# Altium PCB Four_Axis_Remoter_V1.0.0.PcbDoc (part 1 of 2)
Units mil, origin at the board's own origin, x right, y up, seen from the top; angles counter-clockwise.
Board outline 7165.07 x 4173.11 mil, 2 copper layers (Top Layer, Bottom Layer); 91 components, 71 nets, 332 pads, 134 vias.
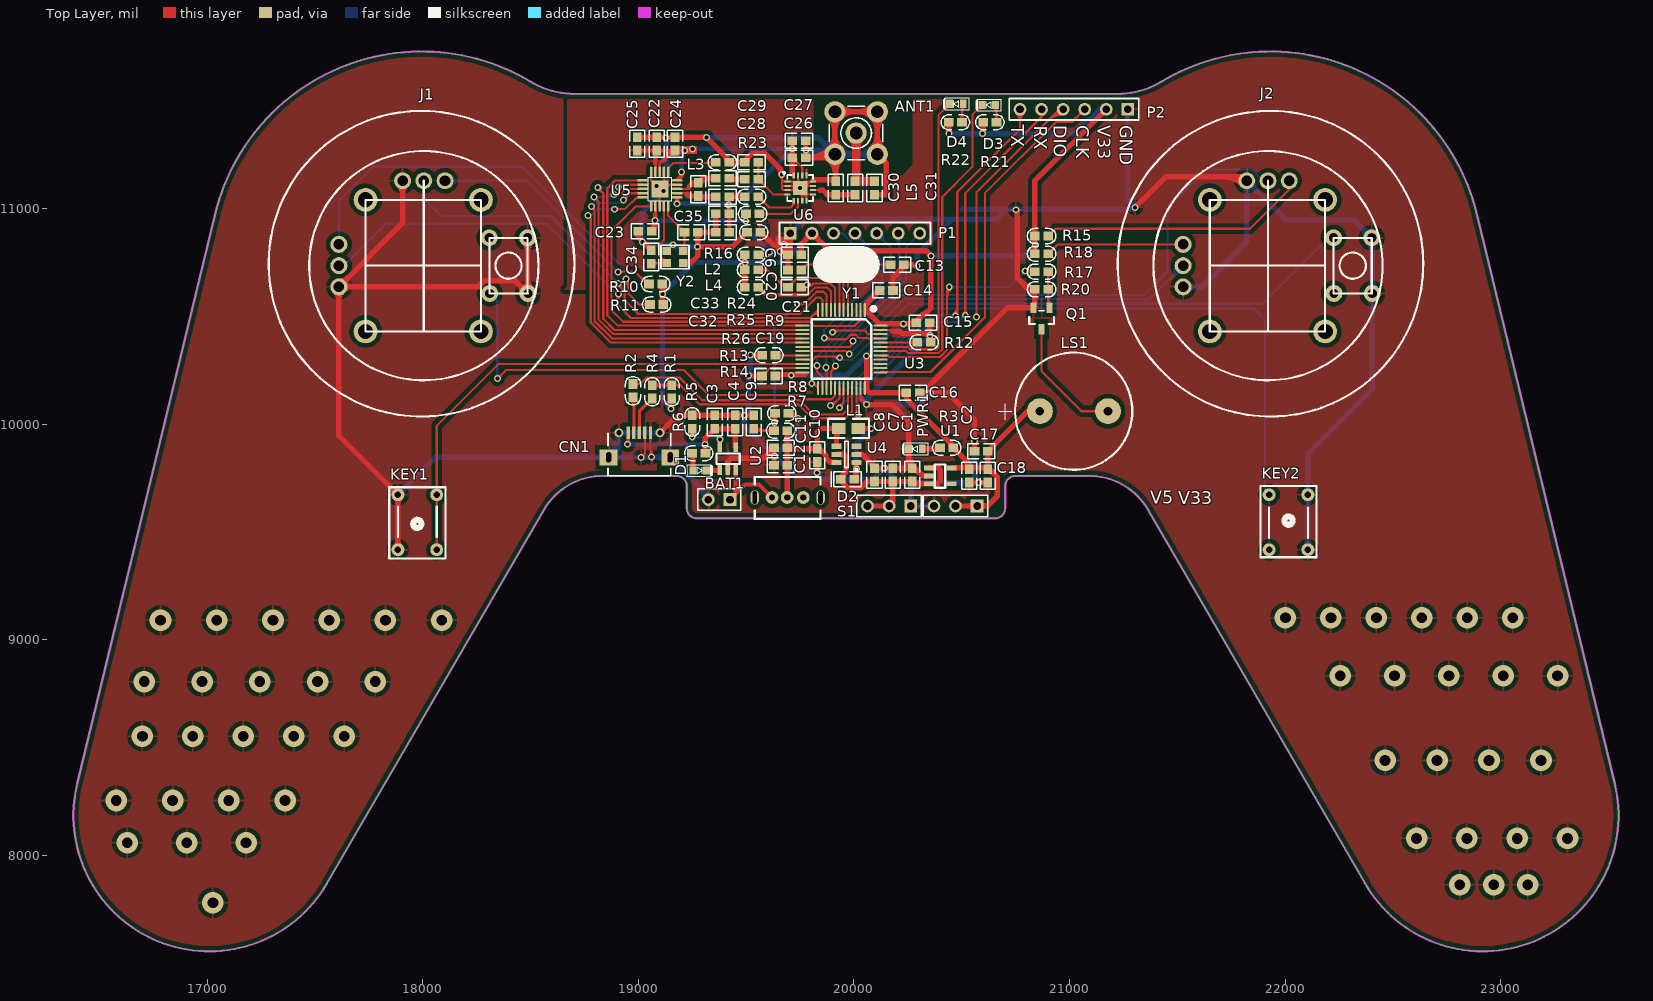
[diagram p0: Top Layer view]
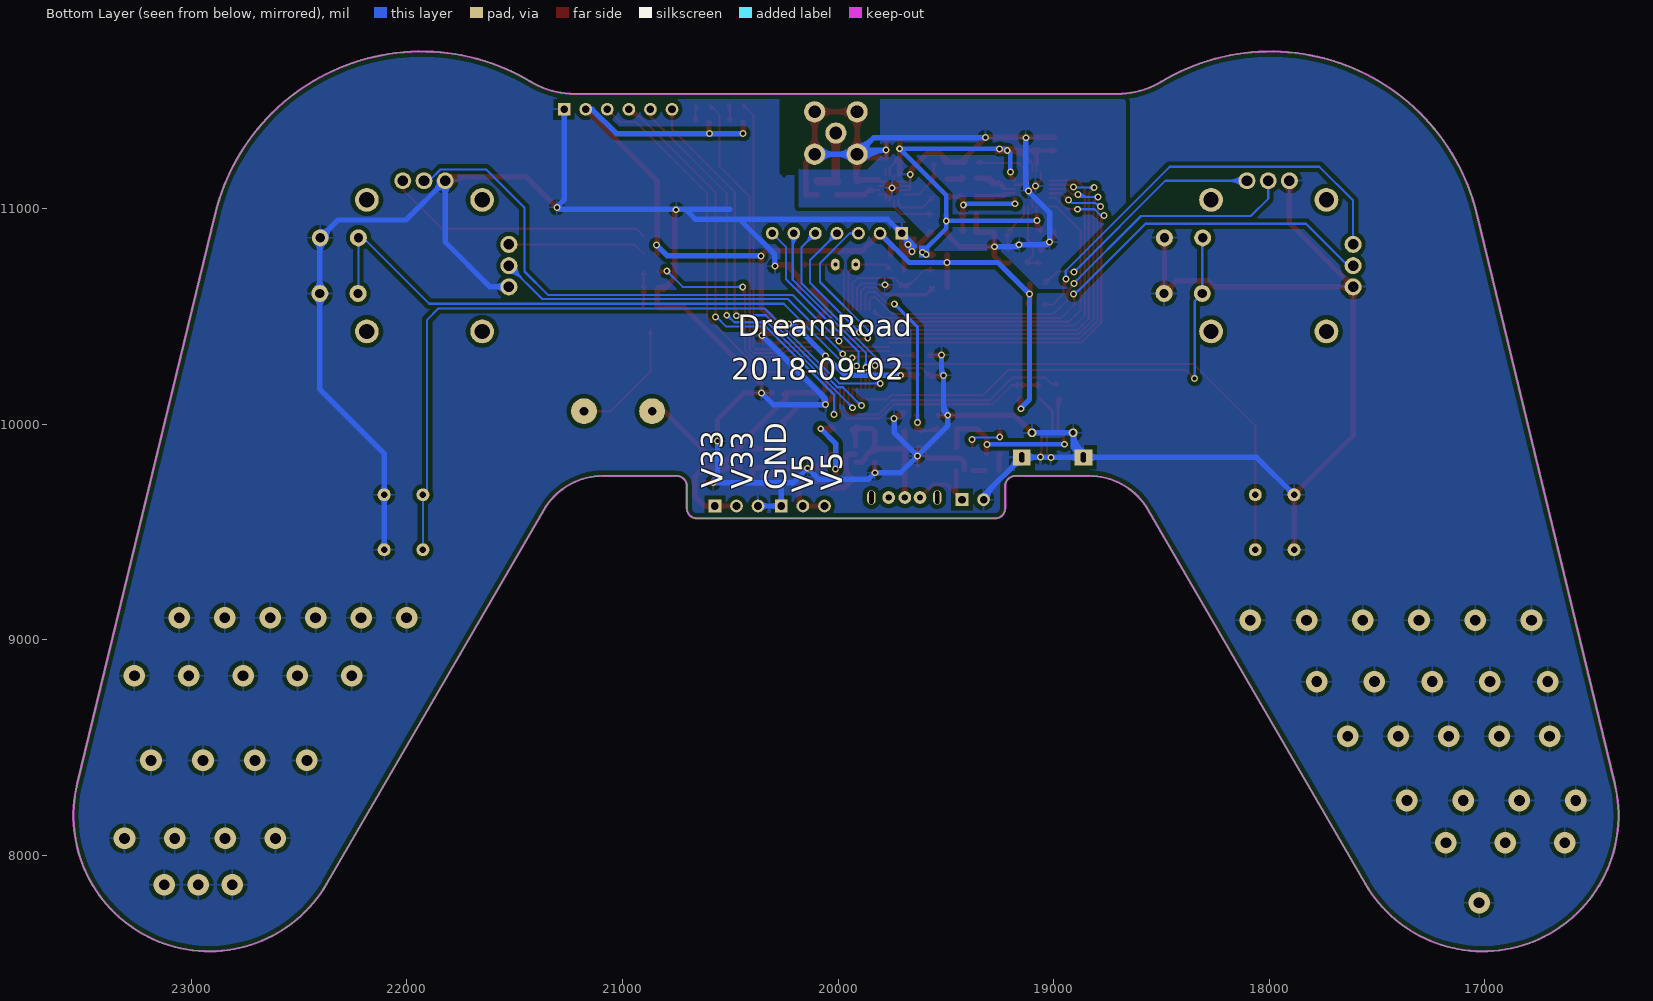
[diagram p1: Bottom Layer view, seen from below]
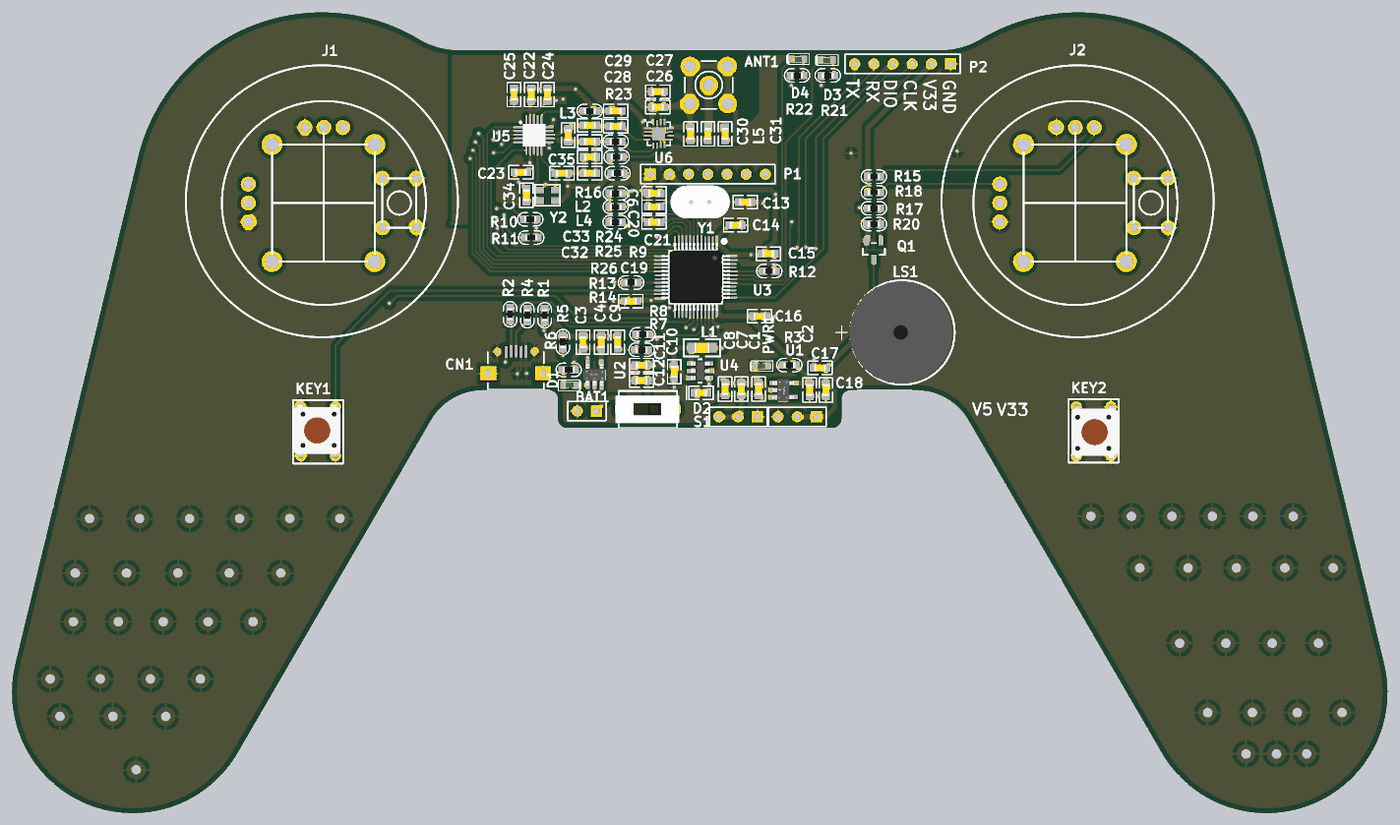
[diagram p3: 3D render of the assembled board from above, using the file's embedded part models]

## Layer stack, top to bottom
Top Layer: signal copper 1.4
Dielectric: dielectric 12.6, FR-4, Dk 4.8
Bottom Layer: signal copper 1.4

## Board outline
16398.01,8333.2 ccw(c17010.24,8184.94) 17554.97,7868.6 18562.17,9602.96 cw(c18834.53,9444.79) 18834.53,9759.75 19177.57,9759.75 cw(c19177.57,9712.5) 19224.81,9712.5 19224.81,9610.14 ccw(c19272.05,9610.14) 19272.05,9562.9 20653.95,9562.9 ccw(c20653.95,9610.14) 20701.19,9610.14 20701.19,9712.5 cw(c20748.43,9712.5) 20748.43,9759.75 21091.47,9759.75 cw(c21091.47,9444.79) 21363.83,9602.96 22371.03,7868.6 ccw(c22915.76,8184.94) 23527.99,8333.2 22888.11,10975.64 ccw(c21931.51,10744) 21424.54,11587.65 cw(c21221.75,11925.1) 21221.75,11531.4 18704.25,11531.4 cw(c18704.25,11925.1) 18501.46,11587.65 ccw(c17994.49,10744) 17037.89,10975.64

## Design rules (kind name [scope] priority, off if disabled: settings)
Clearance Clearance_1 [(InPolygon)] p1: gap=20
Clearance [All] p2: gap=7.87
ComponentClearance [All] p1 off: gap=10 collisioncheckmode=3 verticalgap=10 showdistances=FALSE
HoleSize [All] p1 off: absolutevalues=TRUE maxlimit=100 minlimit=1 maxpercent=80.000 minpercent=20.000
HoleToHoleClearance [All] p1 off: gap=10 allowstackedmicrovias=TRUE
LayerPairs [All] p1 off: enforce=TRUE
MinimumSolderMaskSliver [All] p1 off: minsoldermaskwidth=10
NetAntennae [All] p1 off: netantennaetolerance=0
PolygonConnect [All] p1: connectstyle=Relief reliefconductorwidth=10 reliefentries=4 polygonreliefangle="90 Angle"
RoutingVias [All] p1: holewidth=14 width=24 viastyle="Through Hole" minholewidth=12 minwidth=20 maxholewidth=50 maxwidth=100
SilkToSilkClearance [All] p1 off: silktosilkclearance=10
SilkscreenOverComponentPads [IsPad] p1 off: minsilkscreentomaskgap=10
SolderMaskExpansion [All] p1: expansion=4
Width [All] p1: maxlimit=200 minlimit=10 preferedwidth=10
20 further rules are at their usual default settings.

## Components (designator, comment, footprint, x,y, rotation, side; value= is the part's Value field where it differs from the comment)
ANT1 "SMA-2" SMB_V-RJ45 20010,11350 r270 top locked
BAT1 "BAT" HDR1X2 19425,9650 r180 top
C1 "1uF" C0603 20270,9765 r0 top
C2 "1uF" C0603 20535,9760 r180 top
C3 "4.7uF" C0603 19355,10010 r0 top
C4 "0.1uF" C0603 19450,10010 r0 top
C6 "0.1uF" C0603 19725,10785 r90 top
C7 "22uF" C0603 20180,9765 r0 top
C8 "22uF" C0603 20095,9765 r0 top
C9 "C_0603" C0603 19535,10010 r0 top
C10 "22uF" C0603 19830,9855 r180 top
C11 "C_0603" C0603 19660,9890 r90 top
C12 "4.7uF" C0603 19660,9810 r90 top
C13 "22pF" C0603 20200,10740 r270 top
C14 "4.7uF" C0603 20150,10620 r270 top
C15 "1uF" C0603 20320,10470 r270 top
C16 "0.1uF" C0603 20274,10145 r270 top
C17 "0.1uF" C0603 20590,9875 r90 top
C18 "0.1uF" C0603 20620,9760 r180 top
C19 "0.1uF" C0603 19604,10223 r90 top
C20 "22pF" C0603 19725,10715 r90 top
C21 "0.1uF" C0603 19725,10635 r270 top
C22 "4.7uF" C0603 19085,11300 r180 top
C23 "10nF" C0603 19031,10895 r270 top
C24 "1nF" C0603 19170,11300 r180 top
C25 "33nF" C0603 18995,11300 r180 top
C26 "1.5pF" C0603 19745,11235 r270 top
C27 "1.5pF" C0603 19745,11315 r270 top
C28 "1.5pF" C0603 19525,11135 r270 top
C29 "1pF" C0603 19525,11215 r270 top
C30 "2.2nF" C0603 19915,11095 r180 top
C31 "2.2nF" C0603 20095,11095 r0 top
C32 "2.2nF" C0603 19390,10890 r270 top
C33 "4.7pF" C0603 19390,10975 r270 top
C34 "10pF" C0603 19060,10775 r0 top
C35 "10pF" C0603 19245,10890 r270 top
CN1 "Micro USB" MICRO_USB_9 19005,9960 r0 top
D1 "LED1" LED0603-green 19285,9785 r0 top
D2 "1SS400SMT2R" L0603 19970,9745 r270 top
D3 "LED1" LED0603-green 20625,11480 r180 top
D4 "LED1" LED0603-green 20475,11485 r180 top
J1 "油门摇杆" 摇杆2 18175,10670 r180 top locked
J2 "方向摇杆" 摇杆2 22090,10670 r180 top locked
KEY1 "KEY_L" SW-4PIN-DIP 17975,9545 r180 top
KEY2 "KEY_R" SW-4PIN-DIP 22015,9545 r0 top
L1 "2.2uH" C0805 19975,9980 r180 top
L2 "3.9nH" C0603 19390,11140 r90 top
L3 "8.2nH" C0603 19278,11089 r180 top
L4 "2.7nF" C0603 19390,11055 r90 top
L5 "3.9nH" C0603 20005,11095 r180 top
LS1 "Bell" BUZZER 21020,10060 r180 top
P1 "OLED" HDR1X7 19705,10885 r0 top
P2 "Header 6" HDR1X6 21270,11460 r180 top
PWR1 "RED" LED0603-green 20285,9885 r180 top
Q1 "2K3018" LC-SOT-23(SOT-23-3) 20870,10490 r90 top
R1 "1.5K" "R0603 - 1" 19155,10150 r0 top
R2 "22R" "R0603 - 1" 18975,10155 r180 top
R3 "1K" "R0603 - 1" 20430,9890 r90 top
R4 "22R" "R0603 - 1" 19065,10150 r180 top
R5 "4.7k" "R0603 - 1" 19250,10010 r0 top
R6 "4.7K" "R0603 - 1" 19280,9865 r90 top
R7 "100K" "R0603 - 1" 19660,9970 r270 top
R8 "100K" "R0603 - 1" 19665,10050 r90 top
R9 "10K" "R0603 - 1" 19605,10320 r90 top
R10 "0R" "R0603 - 1" 19080,10650 r90 top
R11 "0R" "R0603 - 1" 19085,10555 r270 top
R12 "10K" "R0603 - 1" 20325,10380 r90 top
R13 "10K" "R0603 - 1" 19525,10715.35 r270 top
R14 "10R" "R0603 - 1" 19525,10635.35 r90 top
R15 "0R" "R0603 - 1" 20870,10872.5 r270 top
R16 "22K" "R0603 - 1" 19390,11215 r270 top
R17 "1K" "R0603 - 1" 20870,10707.5 r90 top
R18 "0R" "R0603 - 1" 20870,10790 r90 top
R20 "10K" "R0603 - 1" 20870,10625 r270 top
R21 "1K" "R0603 - 1" 20630,11400 r270 top
R22 "1K" "R0603 - 1" 20470,11400 r270 top
R23 "1K" "R0603 - 1" 19525,11055 r90 top
R24 "1K" "R0603 - 1" 19530,10975 r90 top
R25 "0R" "R0603 - 1" 19535,10890 r90 top
R26 "0R" "R0603 - 1" 19525,10785.35 r270 top
S1 "SW-SPDT" SWITCH_PWR 19540,9660 r90 top
U1 "TC1185" SOT-23-5 20400,9760 r0 top
U2 "WS4518" SOT-23-5 19415,9840 r90 top
U3 "STM32F103C8T6" LQFP48S 20050,10530 r270 top locked
U4 "WD3120E-6/TR" SOT23-6 19965,9860 r180 top
U5 "Si24R1" QFN-20_4x4 19020,11130 r0 top
U6 "RFX2401C" QFN16 19750,11095 r0 top
V5 "Header 3" HDR1X3 20263,9620.42 r180 top
V33 "Header 3" HDR1X3 20571,9620.42 r180 top
Y1 "XTAL" "XTAL - 2" 19965,10740 r180 top
Y2 "16M" CRYSTAL_RSX-10 19170,10775 r0 top

## Footprints (in the part's own frame and the unit in brackets; to place one, negate y for a bottom-side part, rotate by r counter-clockwise, add the part's x,y. Pads: shape width x height; smd on the part's side, far side on the other; paste and mask are expansions set on the pad)
BUZZER [mil]
  round 120 hole 40: 1(158,0) 2(-158,0)
  silkscreen extent -271,-272 348,272, body extent -260,-270 280,269, height 299
C0603 [mil] "SMT电容"
  rect 40x45 smd: 1(0,31) 2(0,-31)
  silkscreen extent -35,-63 35,63, body extent -18,-32 18,31, height 31
C0805 [mm] "SMT电容"
  rect 1.6x1.3 smd: 1(-1.143,0) 2(1.143,0)
  silkscreen extent -2.41,-1.14 2.41,1.14, body extent -1,-0.67 1,0.68, height 1.2
CRYSTAL_RSX-10 [mm]
  rect 1.03x0.9 smd: 1(-0.965,-0.705) 2(0.965,-0.705) 3(0.965,0.705) 4(-0.965,0.705)
  silkscreen extent -1.65,-1.4 1.65,1.4, body extent -1.6,-1.27 1.61,1.24, height 0.7
HDR1X2 [mm] "Connector; Header; 2 Position"
  rect 1.5x1.5 hole 0.9: 1(0,0)
  round 1.5 hole 0.9: 2(2.54,0)
  silkscreen extent -1.27,-1.27 3.81,1.27
HDR1X3 [mm] "Connector; Header; 3 Position"
  rect 1.5x1.5 hole 0.9: 1(0,0)
  round 1.5 hole 0.9: 2(2.54,0) 3(5.08,0)
  silkscreen extent -1.27,-1.27 6.35,1.27
HDR1X6 [mm] "Connector; Header; 6 Position"
  rect 1.5x1.5 hole 0.9: 1(0,0)
  round 1.5 hole 0.9: 2(2.54,0) 3(5.08,0) 4(7.62,0) 5(10.16,0) 6(12.7,0)
  silkscreen extent -1.27,-1.27 13.97,1.27
HDR1X7 [mm] "Connector; Header; 7 Position"
  rect 1.5x1.5 hole 0.9: 1(0,0)
  round 1.5 hole 0.9: 2(2.54,0) 3(5.08,0) 4(7.62,0) 5(10.16,0) 6(12.7,0) 7(15.24,0)
  silkscreen extent -1.27,-1.27 16.51,1.27
L0603 [mil]
  rect 40x45 smd: 1(0,31) 2(0,-31)
  silkscreen extent -35,-76 35,63, body extent -18,-32 18,31, height 31
LC-SOT-23(SOT-23-3) [mm]
  rect 1.25x0.7 smd: 1(1.25,-0.95) 2(1.25,0.95) 3(-1.25,0)
  silkscreen extent -0.65,-1.46 0.9,1.46
LED0603-green [mm]
  rect 0.8x1 smd: 1(-0.8,0) 2(0.8,0)
  silkscreen extent -1.5,-0.7 1.5,0.7, body extent -0.8,-0.38 0.8,0.42, height 0.6
LQFP48S [mil] "DPIN-0.5"
  oval 65x10 smd: 1(0.42,0.29) 2(0.42,-19.39) 3(0.42,-39.08) 4(0.42,-58.76) 5(0.42,-78.45) 6(0.42,-98.13) 7(0.42,-117.82) 8(0.42,-137.5) 9(0.42,-157.19) 10(0.42,-176.87) 11(0.42,-196.56) 12(0.42,-216.24) 25(362.63,-216.24) 26(362.63,-196.56) 27(362.63,-176.87) 28(362.63,-157.19) 29(362.63,-137.5) 30(362.63,-117.82) 31(362.63,-98.13) 32(362.63,-78.45) 33(362.63,-58.76) 34(362.63,-39.08) 35(362.63,-19.39) 36(362.63,0.29)
  oval 10x65 smd: 13(73.26,-289.08) 14(92.94,-289.08) 15(112.63,-289.08) 16(132.31,-289.08) 17(152,-289.08) 18(171.68,-289.08) 19(191.37,-289.08) 20(211.05,-289.08) 21(230.74,-289.08) 22(250.42,-289.08) 23(270.11,-289.08) 24(289.79,-289.08) 37(289.79,73.13) 38(270.11,73.13) 39(250.42,73.13) 40(230.74,73.13) 41(211.05,73.13) 42(191.37,73.13) 43(171.68,73.13) 44(152,73.13) 45(132.31,73.13) 46(112.63,73.13) 47(92.94,73.13) 48(73.26,73.13)
  silkscreen extent -10,-246 319,46, body extent 3,-284 357,70, height 59
MICRO_USB_9 [mm]
  rect 0.4x1.5 smd: 1(-1.3,0) 2(-0.65,0) 3(0,0) 4(0.65,0) 5(1.3,0)
  round 1.05 hole 0.6: 6(-2.425,0) 7(2.425,0)
  rect 2.1x1.9 hole 0.6 slot 1.2 at 90 deg: 8(-3.625,-2.9) 9(3.625,-2.9)
  silkscreen extent -3.7,-5.05 3.7,-0.05
QFN16 [mm] "QFN, 16-Leads, Body 3.1x3.1mm (max), Pitch 0.50mm, IPC Medium Density"
  rect 0.7x0.25 smd: 1(-1.5,0.75) 2(-1.5,0.25) 3(-1.5,-0.25) 4(-1.5,-0.75) 9(1.5,-0.75) 10(1.5,-0.25) 11(1.5,0.25) 12(1.5,0.75)
  rect 0.25x0.7 smd: 5(-0.75,-1.5) 6(-0.25,-1.5) 7(0.25,-1.5) 8(0.75,-1.5) 13(0.75,1.5) 14(0.25,1.5) 15(-0.25,1.5) 16(-0.75,1.5)
  rect 0x0 smd: 17(-1.25,0) 19(0,1.25) 21(1.25,0) 23(0,-1.25)
  rect 1.7x1.7 smd: 17(0,0)
  silkscreen extent -1.98,-1.52 1.52,1.88
QFN-20_4x4 [mm] "QFN, 20-Leads, Body 4.0x4.0mm (max), Pitch 0.50mm, IPC Medium Density"
  rect 2x2 smd: 0(2.032,-1.016)
  oval 1.25x0.3 smd: 1(0,0) 2(0,-0.5) 3(0,-1) 4(0,-1.5) 5(0,-2) 11(4.064,-2) 12(4.064,-1.5) 13(4.064,-1) 14(4.064,-0.5) 15(4.064,0)
  round 0.5 on Top Overlay: 3(0.254,0.635)
  oval 0.3x1.25 smd: 6(1,-3.048) 7(1.5,-3.048) 8(2,-3.048) 9(2.5,-3.048) 10(3,-3.048) 16(3,1.016) 17(2.5,1.016) 18(2,1.016) 19(1.5,1.016) 20(1,1)
  silkscreen extent 0.64,-2.41 3.43,0.38, body extent 0.53,-2.54 3.53,0.46, height 0.62
"R0603 - 1" [mil] "SMT电阻"
  rect 40x45 smd: 1(0,31) 2(0,-31)
  silkscreen extent -35,-66 35,66, body extent -15,-31 16,31, height 20
SMB_V-RJ45 [mm] "Connector; SMB Straight"
  round 2.5 hole 1.5: 1(0,0) 2(-2.5,2.5) 2(-2.5,-2.5) 2(2.5,2.5) 2(2.5,-2.5)
  silkscreen extent -3.15,-3.15 3.15,3.15
SOT23-6 [mm]
  rect 1.15x0.6 smd: 1(-1.175,0.95) 2(-1.175,0) 3(-1.175,-0.95) 4(1.175,-0.95) 5(1.175,0) 6(1.175,0.95)
  silkscreen extent -1.3,-1.55 0.2,1.92, body extent -1.25,-1.4 1.18,1.4, height 1.09
SOT-23-5 [mil]
  rect 45x22 smd: 1(-52.5,37) 2(-52.5,0) 3(-52.5,-37) 4(52.5,-37) 5(52.5,37)
  silkscreen extent -26,-55 24,53, body extent -57,-57 54,57, height 43
SW-4PIN-DIP [mil]
  round 60 hole 30: 1(-90,127.5) 1(-90,-127.5) 2(90,127.5) 2(90,-127.5)
  silkscreen extent -130,-163 130,168, body extent -117,-160 127,151, height 191
SWITCH_PWR [mm]
  round 1.5 hole 0.75: 1(0,-2.032) 2(0,-3.81) 3(0,-5.715)
  oval 1.676x1 hole 0.5 slot 1.5 at 0 deg: ""(0,0) ""(0,-7.747)
  silkscreen extent -2.54,-7.75 2.41,0, body extent -1.85,-8.06 1.85,0.44, height 6.5
"XTAL - 2" [mm] "10*4.5----5"
  oval 1x1.4 hole 0.5: 1(-1.2,0) 2(1.2,0)
  silkscreen extent -3.81,-2.05 3.81,2.05, body extent -3.81,-2.06 3.81,2.06, height 1.8
摇杆2 [mm]
  round 2.8 hole 1.8: 0(-2.413,6.102) 0(-2.413,-9.398) 0(11.176,6.102) 0(11.176,-9.398)
  round 2 hole 1.25: 1(14.318,0.849) 2(14.318,-1.651) 3(14.318,-4.151) 4(6.818,-11.651) 5(4.318,-11.651) 6(1.818,-11.651)
  round 2 hole 1.1: J1(-7.95,1.626) J1(-7.904,-4.925) J2(-3.45,1.626) J2(-3.404,-4.925)
  silkscreen extent -9.18,-15.15 17.81,11.85

## Part data
ANT1: library part CHIP_ANTENNA
BAT1: "Header, 2-Pin"
C1 C2 C3 C4 C6 C12: library part 电容
C7 C8 C10 C13 C14 C15 C16 C17 C18 C19 C20 C22 C23 C24 C25 C26 C27 C28 C29 C30 C31 C32 C33 C34 C35: library part CAP, "SMT电容"
C21: library part C
CN1: library part Mini_USB_2, "MINI USBͷ"
D1 D3 D4: library part LED0, "Typical INFRARED GaAs LED"
D2: library part "Diode 1N914", "二极管"
J1 J2: library part 摇杆_1, "摇杆"
KEY1 KEY2: library part KEY
L1 L2 L3 L4 L5: library part Inductor, "Inductor"
LS1: "Electrical Bell"
P1: library part "Header 7", "Header, 7-Pin"
P2: "Header, 6-Pin"
PWR1: library part LED1
Q1: library part NMOS-2, "N-Channel Power MOSFET"
R1 R2 R3 R4 R5 R6 R7 R8 R9 R10 R11 R12 R13 R14 R15 R16 R17 R18 R20 R21 R22 R23 R24 R25 R26: library part RES1, "SMT电阻"
S1: "SPDT Subminiature Toggle Switch, Right Angle Mounting, Vertical Actuation"
U1: library part S1132, "DC-DC"
U2: library part LTC4054
U3: "STM32 ARM-based 32-bit MCU with 64 Kbytes Flash, 48-pin LQFP, Industrial Temperature"
U4: library part S-8261
U5: library part nRF24L01
V5 V33: "Header, 3-Pin"
Y1: "Crystal Oscillator"
Y2: library part XTAL-4, "Crystal Oscillator"

## Via types
v1: diameter 32, hole 18, Top Layer to Bottom Layer, tented both sides, 88 vias
v2: diameter 100, hole 50, Top Layer to Bottom Layer, tented both sides, 46 vias

## Nets (pads, with @x,y where several pads share a name; then routed paths per layer and width w, separated by ;. In a path a pad name is that pad's centre, name@x,y a point inside that pad or via, vN(x,y) a via of type N, cw(c..) or ccw(c..) an arc to the next point about the centre after c; other vN are vias at no path point)
ADC_BAT: C9.2 R7.2 R8.1 U3.10 | length 1383
  Top Layer w10: v1@19740,10556.85 19769.26,10556.85 19826.7,10614.29 19857.58,10614.29 19873.13,10598.74 U3.10@19873.13,10529.58 19873.13,10568.26 ; v1@19746.78,10549.56 cw(c19764.38,10531.96) 19764.38,10556.85 ; v1@19746.78,10565.12 ccw(c19766.73,10585.07) 19766.73,10556.85
  Top Layer w15: C9.2@19535,9979 19544,9970 R7.2@19629,9970 19634,9975 R8.1@19634,10050 ; C9.2@19543.84,9985.34 ccw(c19580.87,10022.37) 19580.87,9970 ; R7.2@19617.66,9961.16 ccw(c19596.32,9939.82) 19596.32,9970 ccw(c19596.32,10000.18) R7.2@19617.66,9978.84 ; R7.2@19622.66,9978.84 ccw(c19595.29,10006.21) v1@19634,10006.21 ; v1@19624.99,10001.91 cw(c19603.24,9980.15) R7.2@19634,9980.15 ; v1@19624.99,10013.93 ccw(c19603.24,10035.68) R8.1@19634,10035.68 ; R8.1@19625.16,10041.16 cw(c19603.82,10019.82) 19634,10019.82 cw(c19664.18,10019.82) R8.1@19642.84,10041.16 ; v1@19634,9994.14 ccw(c19655.64,9994.14) R7.2@19640.34,9978.84
  Bottom Layer w15: v1@19624.99,10013.93 ccw(c19610.48,10028.44) 19631,10028.44 ccw(c19651.52,10028.44) v1@19637.01,10013.93 ; v1(19631,10007.92) 19631,10449.34 v1(19739,10557.34) ; v1@19730.5,10557.34 cw(c19709.98,10557.34) 19724.49,10542.83 cw(c19739,10528.32) v1@19739,10548.84
ADC_PITCH: J1.2 U3.12 | length 2652.7
  Top Layer w10: v1@18900.22,10594.85 cw(c18891.1,10585.72) 18904,10585.72 ; 18904,10566.41 cw(c18944.21,10566.41) v1@18915.78,10594.85 ; v1@18904,10600.69 18904,10553.75 18965.26,10492.49 19796.67,10492.49 U3.12@19833.76,10529.58 ; 19803.88,10499.7 cw(c19833.76,10469.83) U3.12@19833.76,10512.08 ; 19820.95,10516.77 cw(c19833.76,10503.97) U3.12@19833.76,10522.08
  Bottom Layer w10: J1.2@17611.3,10735 17635.07,10735 17829.6,10929.54 18574.43,10929.54 18901.35,10602.62 v1(18908,10602.62) ; 18877.86,10626.11 ccw(c18908,10656.24) v1@18908,10613.62
ADC_ROLL: J1.5 U3.11 | length 2348.1
  Top Layer w10: v1@18902,10648.57 18902.89,10648.57 18936.87,10614.58 18936.87,10574.14 19000.65,10510.36 19748.04,10510.36 19825.15,10587.47 19842.27,10587.47 19853.44,10576.3 U3.11@19853.44,10529.58 ; v1@18906,10641 cw(c18906,10630.24) 18913.61,10637.85 ; v1@18917,10652 ccw(c18959.35,10652) 18929.4,10622.05
  Bottom Layer w10: J1.5@18005,11128.7 18005,11045.77 18085.85,10964.93 18594.85,10964.93 18907,10652.78 18906.22,10652 v1(18906,10652) ; 18885.96,10673.82 cw(c18864.15,10652) v1@18895,10652 ; 18890.26,10669.52 ccw(c18906,10685.26) v1@18906,10663
ADC_THRUST: J2.2 U3.19 | length 2198.3
  Top Layer w10: U3.19@19760.92,10338.63 19963.64,10338.63 v1@19973,10329.27
  Bottom Layer w10: v1(19978,10325.69) 20232.88,10580.57 21371.87,10580.57 J2.2@21526.3,10735 ; v1@19978,10336.69 ccw(c19978,10363.24) 19996.78,10344.47 ccw(c20015.56,10325.69) v1@19989,10325.69 ; J2.2@21491.93,10735 cw(c21408.95,10735) 21467.63,10676.33 cw(c21526.3,10617.65) J2.2@21526.3,10700.63 ; J2.2@21501.93,10735 cw(c21443.09,10735) 21484.7,10693.4 cw(c21526.3,10651.8) J2.2@21526.3,10710.63
ADC_YAW: J2.5 U3.18 | length 2754.6
  Top Layer w10: U3.18@19760.92,10358.32 19980.84,10358.32 v1@20001.51,10378.99 ; 19987.11,10364.58 ccw(c19979.68,10372) v1@19987.65,10378.84
  Bottom Layer w10: v1(19996,10386) 20208.44,10598.44 21344.29,10598.44 21454,10708.15 21454,11003.77 21631.17,11180.94 21843.22,11180.94 21895.46,11128.7 J2.5@21920,11128.7 ; v1@19996,10397 ccw(c19996,10423.56) 20014.78,10404.78 ccw(c20033.56,10386) v1@20007,10386
BEEP: R17.1 U3.41 | length 1342.6
  Top Layer w10: U3.41@20123.13,10318.95 20124.94,10317.13 20158.03,10317.13 20163.79,10311.38 20398.64,10311.38 20432,10344.74 20432,10618.61 v1@20447,10633.61 ; 20432,10585.84 cw(c20492.7,10585.84) v1@20449.78,10628.76 ; 20432,10609.98 cw(c20468.56,10609.98) v1@20442.71,10635.83 ; v1@20788,10703.31 20792.19,10707.5 R17.1@20839,10707.5 R17.1@20834.19,10702.69 ; v1@20801.78,10702.46 cw(c20813.93,10690.31) 20813.93,10707.5 ; v1@20801.78,10718.02 ccw(c20827.18,10743.42) R17.1@20827.18,10707.5 ; R17.1@20825.89,10696.89 ccw(c20800.29,10671.29) 20800.29,10707.5 ccw(c20800.29,10743.71) R17.1@20825.89,10718.11 ; U3.41@20150.63,10318.95 cw(c20150.63,10305.44) 20160.17,10314.99 ccw(c20150.63,10305.44) U3.41@20150.63,10318.95
  Bottom Layer w10: v1(20442,10636.54) 20720.3,10636.54 v1(20794,10710.24) ; v1@20449.78,10628.76 cw(c20468.56,10609.98) 20468.56,10636.54 cw(c20468.56,10663.1) v1@20449.78,10644.32 ; v1@20783,10710.24 cw(c20756.44,10710.24) 20775.22,10691.46 cw(c20794,10672.69) v1@20794,10699.24
DC_V3.3: C2.2 C6.2 C14.2 C15.2 C16.2 C17.2 C18.2 C19.2 LS1.1 P1.2 P2.2 R1.2 R3.2 R10.2 R11.1 R13.2 R14.1 R15.2 R18.1 R21.2 R22.2 R26.2 U1.5 U3.1 U3.24 U3.36 U3.48 V33.1 V33.2 | length 8599.8
  Top Layer w25: 19111,10579.14 ccw(c19137.64,10579.14) R11.1@19118.8,10560.3 ; R10.2@19111,10650 19111,10560 R11.1@19116,10555 ; v1(19152,10071.15) 19152,10116 R1.2@19155,10119 ; 19152,10091.15 cw(c19180.35,10091.15) R1.2@19160.3,10111.2 ; R14.1@19494,10635.35 R13.2@19494,10715.35 R26.2@19494,10785.35 ; C19.2@19631,10230 19635,10230 19774.27,10230 ; C19.2@19642.8,10217.7 cw(c19672.51,10187.99) 19672.51,10230 ; 19692.86,10230 cw(c19692.86,10210.68) v1@19706.53,10224.34 ; v1@19711.47,10224.34 cw(c19725.14,10210.68) 19725.14,10230 ; C6.2@19756,10785 19756,10836 P1.2@19805,10885 19885.59,10804.41 20332.99,10804.41 v1(20357,10780.41) ; P1.2@19787.97,10885 cw(c19746.86,10885) 19775.93,10855.93 cw(c19805,10826.86) 19805,10867.97 cw(c19805,10826.86) 19834.07,10855.93 cw(c19863.14,10885) P1.2@19822.03,10885 ; 20055.98,10551.61 20063,10558.62 ; v1@20057,10309.59 v1@20058,10310.59 ; v1(20058,10316.46) 20059,10315.46 20059,10160.16 20074.16,10145 C16.2@20243,10145 20243,10117.31 20461,9899.31 R3.2@20461,9890 20535,9816 C2.2@20535,9797 ; C14.2@20101.93,10602.93 ccw(c20084.86,10620) C14.2@20109,10620 ; C14.2@20119,10620 20055.98,10556.98 20055.98,10527.23 20117.91,10465.3 v1(20230,10465.3) 20284.3,10465.3 C15.2@20289,10470 20289,10479.31 20320.06,10510.37 ; 20243,10120.86 cw(c20269.64,10120.86) C16.2@20250.8,10139.7 ; 20257.05,10465.3 ccw(c20257.05,10499.45) C15.2@20281.2,10475.3 ; C15.2@20299,10470 cw(c20345.63,10470) 20312.66,10502.97 ; 20329.37,10510.37 20356,10537 v1@20356,10774.71 ; 20437.34,9922.97 cw(c20404.37,9890) R3.2@20451,9890 ; v1@20439,11345.59 R22.2@20439,11400 ; U1.5@20452.5,9797 C2.2@20535,9797 ; V33.2@20471,9620.42 V33.1@20571,9620.42 20619.49,9620.42 20665,9665.93 20665,9755.31 20629.31,9791 C18.2@20620,9791 ; R3.2@20471,9890 ccw(c20495.14,9890) R3.2@20478.07,9872.93 ; 20506.29,9844.71 cw(c20455.07,9793.5) C2.2@20527.5,9793.5 ; 20508.44,9797 cw(c20508.44,9766.94) C2.2@20529.7,9788.2 ; C2.2@20535,9791 C2.2@20535,9797 ; C2.2@20540.3,9788.2 cw(c20561.56,9766.94) 20561.56,9797 ; V33.1@20558.96,9608.38 ccw(c20529.89,9579.31) 20529.89,9620.42 ccw(c20529.89,9661.53) V33.1@20558.96,9632.46 ; V33.1@20583.04,9608.38 cw(c20612.11,9579.31) 20612.11,9620.42 cw(c20612.11,9661.53) V33.1@20583.04,9632.46 ; 20593.44,9797 cw(c20593.44,9766.94) C18.2@20614.7,9788.2 ; v1@20599,11349.43 R21.2@20599,11400 ; C18.2@20614.7,9798.8 ccw(c20599.48,9814.02) 20621,9814.02 ; C18.2@20620,9781 cw(c20620,9734.37) 20652.97,9767.34 ; C17.2@20631,9875 cw(c20655.14,9875) C17.2@20638.07,9892.07 ; R18.1@20839,10790 R15.2@20839,10872.5 20839,11129 P2.2@21170,11460 ; LS1.1@20862,10060 20806,10060 C17.2@20621,9875 20621,9804 20614,9797 C2.2@20535,9797
  Bottom Layer w25: v1@19154,10072.6 19112,10114.6 v1(19112,10603.15) 19258.44,10749.59 v1(19494,10749.59) 19669.59,10749.59 P1.2@19805,10885 ; v1(19709,10226.82) 19968.36,10226.82 v1(20058,10316.46) 20207.7,10466.16 v1@20229.14,10466.16 ; 20184.5,10442.95 cw(c20230,10397.45) v1@20230,10461.8 ; 20196.13,10454.58 cw(c20218.37,10432.34) v1@20228.83,10462 ; v1(20357,10780.41) 20791.69,10780.41 v1(20842,10830.72) ; v1(20440,11347.56) v1(20596,11347.56) 21028.13,11347.56 21140.57,11460 P2.2@21170,11460
DC_V5.0: C1.2 C7.2 C8.2 D2.2 U1.1 U1.3 U4.5 V5.2 V5.3 | length 1185.4
  Top Layer w25: U4.5@19918.74,9860 19952.03,9860 19963,9849.03 19963,9778.31 19939,9754.31 D2.2@19939,9745 19939,9735.69 19970.06,9704.63 20031.94,9704.63 20061.31,9734 C8.2@20095,9734 C7.2@20180,9734 ; U4.5@19929.49,9860.69 cw(c19933.92,9819.44) 19963.26,9848.77 ; U4.5@19929.57,9860.69 cw(c19929.57,9808.13) 19966.73,9845.29 ; 19962.66,9712.03 cw(c19995.63,9745) 19949,9745 cw(c19995.63,9745) 19962.66,9777.97 ; V5.3@20063,9620.42 V5.2@20163,9620.42 20180,9637.42 C7.2@20180,9734 ; C1.2@20275.3,9736.8 ccw(c20308.63,9770.13) 20308.63,9723 ; U1.1@20347.5,9797 20392.41,9797 20400,9789.41 20400,9737.52 20385.48,9723 U1.3@20347.5,9723 20281,9723 C1.2@20270,9734 C7.2@20180,9734
DNC: U6.13 | length 25.8
  Top Layer w10: U6.13@19779.53,11154.06 19779.53,11179.83
GND: BAT1.2 C1.1 C2.1 C3.1 C4.1 C6.1 C7.1 C8.1 C9.1 C10.1 C11.1 C12.1 C13.1 C14.1 C15.1 C16.1 C17.1 C18.1 C19.1 C20.1 C21.1 CN1.4 CN1.5 CN1.6 CN1.7 CN1.8 CN1.9 J1.1 J1.4 J1.J1 J2.1 J2.4 J2.J1 KEY1.2 KEY2.2 P1.1 P2.1 PWR1.2 Q1.2 R5.1 R8.2 R9.1 R12.2 R20.2 R25.2 U1.2 U2.2 U3.8 U3.23 U3.35 U3.47 U4.2 V5.1 V33.3 | length 24223.8
  Top Layer w10: v1(19012.78,9845.21) 19030.59,9863.02 ; v1@19013.2,9856.2 ccw(c19014.09,9879.52) 19030.59,9863.02 ; v1@19023.77,9845.63 cw(c19047.09,9846.52) 19030.59,9863.02 ; 19030.59,9914 CN1.4@19030.59,9960 19030.59,9863.02 ; 19056.18,9885 ccw(c19099.19,9885) v1@19068.78,9854.59 ; CN1.5@19056.18,9960 19056.18,9851.63 v1(19061,9846.81) ; C19.1@19573,10223 19609.89,10259.89 U3.23@19760.92,10259.89 ; C19.1@19575.5,10238 ccw(c19575.5,10268.18) 19596.84,10246.84 ; C19.1@19590.5,10223 cw(c19632.75,10223) 19602.87,10252.87 ; C21.1@19756,10635 C21.1@19764.72,10643.72 ; C21.1@19756.82,10635.82 cw(c19767.54,10625.11) C21.1@19776.5,10637.33 ; C21.1@19760.28,10639.28 cw(c19776.64,10622.93) v1@19782.74,10645.24 ; C21.1@19762.58,10632.11 cw(c19785,10616.27) v1@19785,10643.72 ; C21.1@19765.07,10644.07 cw(c19774.52,10634.63) v1@19782.41,10645.4 ; C21.1@19770.75,10626.34 cw(c19804.31,10602.62) 19804.31,10643.72 ; C21.1@19772.49,10649.45 cw(c19764.72,10651.85) C21.1@19764.72,10643.72 ; C21.1@19774.58,10639.13 ccw(c19764.72,10630.84) C21.1@19764.72,10643.72 ; v1@19790.78,10638.43 cw(c19803.55,10625.66) 19803.55,10643.72 ; v1@19792.94,10650.92 ccw(c19804.32,10656.31) 19804.32,10643.72 ; U3.8@19912.5,10529.58 19912.5,10629.44 19889.89,10652.05 19812.64,10652.05 19804.32,10643.72 ; 20030.61,10123.28 U3.35@20030.61,10167.37 ; v1@20054.8,10088.02 v1@20063,10088.02 ; U3.47@20123.13,10437.06 20123.75,10436.43 20180,10436.43 ; C21.1@19764.72,10643.72 19804.32,10643.72
  Top Layer w20: 20033.8,10123.28 20033.8,10114.63 v1(20058,10090.43)
  Top Layer w25: J1.1@17592.3,10617.57 cw(c17546.43,10571.7) 17611.3,10571.7 cw(c17676.17,10571.7) 17630.3,10617.57 cw(c17676.17,10571.7) 17676.17,10636.57 cw(c17676.17,10701.44) J1.1@17630.3,10655.57 ; J1.1@17611.3,10663.44 ccw(c17611.3,10728.32) 17657.17,10682.44 ccw(c17703.04,10636.57) J1.1@17638.17,10636.57 ; KEY1.2@17867.5,9672.5 ccw(c17825.25,9672.5) 17855.13,9702.37 ccw(c17885,9732.25) KEY1.2@17885,9690 ; KEY1.2@17872.63,9429.87 ccw(c17842.75,9459.75) 17885,9459.75 ccw(c17927.25,9459.75) KEY1.2@17897.37,9429.87 ; KEY1.2@17872.63,9660.13 cw(c17842.75,9630.25) 17885,9630.25 cw(c17927.25,9630.25) KEY1.2@17897.37,9660.13 ; KEY1.2@17885,9417.5 KEY1.2@17885,9672.5 17611.3,9946.2 J1.1@17611.3,10636.57 ; J1.4@17887.57,11109.7 cw(c17841.7,11063.83) 17906.57,11063.83 cw(c17971.44,11063.83) J1.4@17925.57,11109.7 ; J1.4@17906.57,11128.7 17906.57,10931.85 J1.1@17611.3,10636.57 ; J1.J1@18461.13,10606 ccw(c18396.26,10606) 18442.13,10651.87 ccw(c18488,10697.74) J1.J1@18488,10632.87 ; J1.J1@18467.17,10844.91 cw(c18421.3,10799.04) 18486.17,10799.04 cw(c18551.04,10799.04) J1.J1@18505.17,10844.91 ; J1.J1@18469,10625 ccw(c18427.56,10666.44) 18486.17,10666.44 ; 18486.17,10675.3 ccw(c18557.3,10675.3) J1.J1@18507,10625 ; J1.J1@18486.17,10863.91 18486.17,10607.83 18428.26,10665.74 18286.09,10665.74 18256.92,10636.57 J1.1@17611.3,10636.57 ; CN1.7@19100.47,9960 19181.47,10041 R5.1@19250,10041 C3.1@19355,10041 C4.1@19450,10041 v1(19491,10041) C9.1@19535,10041 ; U2.2@19415,9787.5 19415,9826.04 19430.73,9841.76 19580.76,9841.76 C11.1@19629,9890 C12.1@19629,9810 ; v1@19511,10223 C19.1@19573,10223 ; v1@19513.47,10228.7 ccw(c19527.25,10242.48) 19527.25,10223 ; v1@19515.99,10320 R9.1@19574,10320 ; R25.2@19566,10890 19567.35,10890 19672.35,10785 C6.1@19694,10785 ; R25.2@19576,10890 ccw(c19596.88,10890) R25.2@19582.12,10875.23 ; C11.1@19611.93,9872.93 ccw(c19594.86,9890) C11.1@19619,9890 ; v1@19646,10811.34 ccw(c19691.5,10856.84) C6.1@19691.5,10792.5 ; v1@19659.74,10802.5 ccw(c19694,10827.29) C6.1@19694,10785 ; v1@19673.55,10830.32 cw(c19626.04,10781.73) C6.1@19694,10781.73 ; v1@19674,10835.69 ccw(c19647.32,10874) P1.1@19694,10874 ; 19691.03,10848.19 cw(c19684.13,10841.14) 19694,10841.14 ; C20.1@19694,10715 C6.1@19694,10785 ; 19694,10817.34 cw(c19772.66,10817.34) P1.1@19717.04,10872.96 ; R8.2@19696,10050 19712.57,10050 v1@19739,10023.57 ; R8.2@19698.5,10042.5 cw(c19698.5,9990.42) v1@19735.33,10027.25 ; P1.1@19705,10885 P1.1@19694,10874 ; v1@19826,9771.43 19830,9775.43 C10.1@19830,9824 ; U4.2@20011.26,9860 20037.12,9860 20101.12,9796 C7.1@20180,9796 C1.1@20270,9796 ; U4.2@20022.03,9860.69 cw(c20024.56,9832.41) 20044.64,9852.48 ; U4.2@20022.09,9860.69 cw(c20022.09,9826.06) 20046.57,9850.55 ; v1(20058,10090.43) 20175.87,10090.43 20253.5,10012.79 PWR1.2@20253.5,9885 20253.5,9812.5 C1.1@20270,9796 ; C8.1@20079.64,9817.48 cw(c20060.65,9798.5) C8.1@20087.5,9798.5 ; 20180,10430.99 20212.88,10430.99 20223.49,10420.37 20342.98,10420.37 v1@20351,10412.35 ; C14.1@20181,10620 20181,10680.69 20231,10730.69 C13.1@20231,10740 v1@20286.99,10740 ; 20207.34,10707.03 ccw(c20174.37,10740) C13.1@20221,10740 ; 20253.5,9856.43 ccw(c20327.93,9856.43) C1.1@20275.3,9803.8 ; 20266.62,10740 cw(c20266.62,10706.2) v1@20290.53,10730.1 ; C1.1@20270,9786 cw(c20270,9727.7) 20311.22,9768.92 ; C16.1@20305,10145 v1(20355,10145) ; 20311.5,9768.65 ccw(c20336,9793.15) U1.2@20336,9758.5 ; 20321.78,10420.37 cw(c20321.78,10381.13) v1@20349.53,10408.88 ; 20336.07,10427.28 cw(c20305.39,10396.6) R12.2@20346.41,10382.45 ; U1.2@20347.5,9760 20320.15,9760 20284.15,9796 C1.1@20270,9796 ; C15.1@20351,10470 v1@20351,10412.35 ; v1(20352,10411.35) v1@20351,10412.35 ; C2.1@20535,9729 v1(20579,9729) C18.1@20620,9729 ; C17.1@20559,9875 v1(20559,9921.42) 20559,10022 20436,10145 v1(20355,10145) ; v1@20748.53,10991.63 cw(c20726.55,10969.66) 20757.63,10969.66 ; v1(20751,10994.1) 20757.63,10987.48 20757.63,10677.73 20810.35,10625 R20.2@20839,10625 20839,10545.61 Q1.2@20832.6,10539.21 20710.77,10539.21 20355,10183.45 v1(20355,10145) ; 20779.06,10656.29 ccw(c20836.5,10713.73) R20.2@20836.5,10632.5 ; Q1.2@20831.69,10550.94 ccw(c20814.05,10568.58) 20839,10568.58 ; v1(21304,11005.33) 21445.35,11146.69 21803.59,11146.69 J2.4@21821.57,11128.7 ; 21713.28,11146.69 cw(c21713.28,11020.41) J2.4@21802.57,11109.7 ; 21773.63,11146.69 cw(c21773.63,11080.76) J2.4@21820.25,11127.38 ; C6.1@19694,10785 P1.1@19694,10874 ; v1@20351,10404.14 ccw(c20377.64,10404.14) 20358.8,10385.3 cw(c20377.64,10404.14) v1@20351,10404.14
  Bottom Layer w25: KEY1.2@17885,9672.5 18058.33,9845.83 CN1.8@18862.28,9845.83 ; KEY1.2@17885,9690 ccw(c17885,9732.25) 17914.87,9702.37 ccw(c17944.75,9672.5) KEY1.2@17902.5,9672.5 ; CN1.8@18840.74,9828.22 ccw(c18798.23,9785.71) 18798.23,9845.83 ccw(c18798.23,9905.94) CN1.8@18840.74,9863.43 ; CN1.8@18854.42,9867.75 ccw(c18804.78,9960) CN1.6@18909.53,9960 ; CN1.8@18866.22,9870.73 ccw(c18866.22,9921.34) 18902.01,9885.55 ; CN1.8@18866.27,9845.74 ccw(c18827.3,9918.15) 18909.53,9918.15 ; CN1.8@18883.83,9828.22 cw(c18926.34,9785.71) 18926.34,9845.83 cw(c18926.34,9905.94) CN1.8@18883.83,9863.43 ; CN1.8@18891.11,9846.6 cw(c18954.06,9848.54) 18909.53,9893.07 ; CN1.7@19100.47,9960 CN1.6@18909.53,9960 ; CN1.9@19126.17,9828.22 ccw(c19083.66,9785.71) 19083.66,9845.83 ccw(c19083.66,9905.94) CN1.9@19126.17,9863.43 ; CN1.9@19151.65,9820.93 cw(c19151.65,9770.05) 19187.63,9806.02 ; CN1.9@19176.56,9845.83 ccw(c19245.91,9845.83) 19196.87,9796.78 ; 19282.74,9710.91 cw(c19221.83,9650) BAT1.2@19307.97,9650 ; BAT1.2@19325,9650 19325,9668.65 19147.83,9845.83 CN1.9@19147.72,9845.83 CN1.8@18862.28,9845.83 ; v1@19488.53,10043.47 ccw(c19434.27,10097.73) 19511,10097.73 ; v1@19508.53,10228.7 ccw(c19480.82,10256.41) 19520,10256.41 ; v1(19520,10321.43) 19520,10235.23 v1(19511,10226.23) 19511,10061 v1(19491,10041) 19491,9993.5 v1(19632,9852.5) ; 19645.32,10825.32 cw(c19662.83,10807.8) v1@19674.37,10829.72 ; v1@19656.9,10795.23 cw(c19695.96,10795.23) v1@19677.64,10829.73 ; v1(19656.9,10800.44) 19656.9,10836.9 P1.1@19705,10885 19770.21,10950.21 20456.55,10950.21 ; v1@19679.5,10832.82 cw(c19743.91,10832.82) P1.1@19698.37,10878.37 ; P1.1@19687.97,10885 cw(c19646.86,10885) 19675.93,10855.93 cw(c19705,10826.86) P1.1@19705,10867.97 ; P1.1@19705,10902.03 ccw(c19705,10943.14) 19734.07,10914.07 ccw(c19763.14,10885) P1.1@19722.03,10885 ; v1(19740,10026) 19740,9960.5 v1(19632,9852.5) ; v1@20061.5,10090.43 cw(c20134.96,10090.43) 20083.02,10142.37 ; V5.1@20250.96,9632.46 ccw(c20221.89,9661.53) 20263,9661.53 ccw(c20304.11,9661.53) 20275.04,9632.46 ccw(c20304.11,9661.53) 20304.11,9620.42 ccw(c20304.11,9579.31) V5.1@20275.04,9608.38 ; v1(20293,10732.57) 20293,10786.66 20456.55,10950.21 ; v1(20352,10411.35) 20058,10117.35 v1(20058,10090.43) 20300.43,10090.43 v1(20355,10145) ; V33.3@20358.96,9608.38 ccw(c20329.89,9579.31) 20329.89,9620.42 ccw(c20329.89,9661.53) V33.3@20358.96,9632.46 ; V33.3@20371,9620.42 V5.1@20263,9620.42 20263,9714 20248,9729 ; 20502.94,10996.61 20708,10996.61 ; 20559,9785.73 ccw(c20635.73,9785.73) v1@20581.47,9731.47 ; v1(20559,9921.42) 20559,9749 v1(20579,9729) 20248,9729 ; P2.1@21257.96,11447.96 cw(c21228.89,11418.89) 21270,11418.89 cw(c21311.11,11418.89) P2.1@21282.04,11447.96 ; P2.1@21270,11460 21270,11039.33 v1@21302.36,11006.97 ; 21274.48,10996.61 ccw(c21274.48,11034.85) v1@21301.53,11007.81 ; v1(21304,11005.33) v1@21302.36,11006.97 ; v1@21304,11008.6 v1@21302.36,11006.97 ; J2.1@21526.3,10636.57 21613.32,10636.57 21821.57,10844.83 J2.4@21821.57,11128.7 22003.74,10946.54 22318.53,10946.54 J2.J1@22401.17,10863.91 22403,10862.07 J2.J1@22403,10606 22403,10160.88 22105,9862.88 KEY2.2@22105,9672.5 KEY2.2@22105,9417.5 ; J2.1@21545.3,10617.57 cw(c21591.17,10571.7) 21591.17,10636.57 cw(c21591.17,10701.44) J2.1@21545.3,10655.57 ; J2.4@21802.57,11109.7 cw(c21756.7,11063.83) 21821.57,11063.83 cw(c21886.44,11063.83) J2.4@21840.57,11109.7 ; J2.4@21821.57,11101.83 cw(c21821.57,11036.96) 21867.44,11082.83 cw(c21913.32,11128.7) J2.4@21848.44,11128.7 ; KEY2.2@22092.63,9429.87 ccw(c22062.75,9459.75) 22105,9459.75 ccw(c22147.25,9459.75) KEY2.2@22117.37,9429.87 ; KEY2.2@22092.63,9660.13 cw(c22062.75,9630.25) 22105,9630.25 cw(c22147.25,9630.25) KEY2.2@22117.37,9660.13 ; KEY2.2@22092.63,9684.87 ccw(c22062.75,9714.75) 22105,9714.75 ccw(c22147.25,9714.75) KEY2.2@22117.37,9684.87 ; J2.J1@22374.3,10863.91 ccw(c22309.43,10863.91) 22355.3,10909.78 ccw(c22401.17,10955.65) J2.J1@22401.17,10890.78 ; J2.J1@22382.17,10844.91 cw(c22331.87,10794.61) 22403,10794.61 ; J2.J1@22384,10587 cw(c22338.13,10541.13) 22403,10541.13 cw(c22467.87,10541.13) J2.J1@22422,10587 ; J2.J1@22384,10625 ccw(c22338.13,10670.87) 22403,10670.87 ccw(c22467.87,10670.87) J2.J1@22422,10625 ; 22403,10803.46 cw(c22461.61,10803.46) J2.J1@22420.17,10844.91 ; CN1.8@18862.28,9845.83 18909.53,9893.07 ; 18909.53,9893.07 CN1.6@18909.53,9960 ; v1(19632,9852.5) 19709.94,9774.56 v1(19829,9774.56) 19858.87,9744.69 20090.34,9744.69 v1(20141,9795.36) 20207.36,9729 20248,9729 ; 20456.55,10950.21 20661.61,10950.21 20708,10996.61 ; 20708,10996.61 21292,10996.61 v1@21302.36,11006.97
  other v1: 19783,10646.21 19676,10832.82
  other v2: 17027,7780.81 22809,7863.44 22967,7863.44 23125,7863.44 16630,8058.93 16905.5,8058.93 17181,8058.93 22609,8078.82 22842.33,8078.82 23075.67,8078.82 23309,8078.82 16579,8254.52 16840,8254.52 17101,8254.52 17362,8254.52 22463,8440.36 22704,8440.36 22945,8440.36 23186,8440.36 16700,8552.57 16934,8552.57 17168,8552.57 17402,8552.57 17636,8552.57 16709,8805.98 16976.75,8805.98 17244.5,8805.98 17512.25,8805.98 17780,8805.98 22255,8832.67 22507,8832.67 22759,8832.67 23011,8832.67 23263,8832.67 16784,9090.44 17044.8,9090.44 17305.6,9090.44 17566.4,9090.44 17827.2,9090.44 18088,9090.44 22001,9101.9 22211.8,9101.9 22422.6,9101.9 22633.4,9101.9 22844.2,9101.9 23055,9101.9
KEY_LEFT: KEY1.1 U3.22 | length 2389.8
  Top Layer w10: KEY1.1@18065,9417.5 18065,9992.45 18352.13,10279.58 U3.22@19760.92,10279.58
KEY_RIGHT: KEY2.1 U3.25 | length 3425.7
  Top Layer w10: v1@19801,10189.13 v1(19804,10189.13) 19812,10189.13 U3.25@19833.76,10167.37
  Bottom Layer w10: v1(19804,10189.13) 19994.66,10189.13 20258.87,10453.34 20258.87,10454.28 20341.28,10536.68 21852.55,10536.68 21905.62,10483.61 21905.62,9691.88 KEY2.1@21925,9672.5 KEY2.1@21925,9417.5 ; v1@19811.78,10181.35 cw(c19830.56,10162.57) 19830.56,10189.13 cw(c19830.56,10215.69) v1@19811.78,10196.91
KEY_STICK1: J2.J2 U3.21 | length 2977.7
  Top Layer w10: U3.21@19760.92,10299.26 19809.5,10299.26 19824.21,10313.97 19924.01,10313.97 19926.2,10311.78 v1@19933.56,10319.14 ; 19893.15,10313.97 cw(c19893.15,10267.2) v1@19926.22,10300.27 ; 19917.29,10313.97 cw(c19917.29,10291.34) v1@19933.29,10307.34
  Bottom Layer w10: v1(19934,10308.05) 19935.45,10308.05 19946.69,10296.81 19989.96,10296.81 20251.43,10558.29 ; 20252.23,10557.49 20253.02,10558.29 21896.36,10558.29 22186,10847.93 ; J2.J2@22224,10607.83 J2.J2@22224,10863.91
KEY_STICK2: J1.J2 U3.29 | length 2453
  Top Layer w10: v1@18342,10205 18388.03,10251.04 19210.67,10251.04 19326.33,10135.38 19751.6,10135.38 19771.43,10115.55 19896.07,10115.55 19912.5,10131.98 U3.29@19912.5,10167.37 ; v1@18346,10223.47 ccw(c18346,10258.4) 18370.7,10233.7 ; v1@18357,10212.47 cw(c18375.19,10212.47) 18362.33,10225.33 ; 19906.91,10126.39 ccw(c19893.44,10139.87) U3.29@19912.5,10139.87
  Bottom Layer w10: J1.J2@18309,10863.91 18310.83,10862.07 J1.J2@18310.83,10606 18346,10570.83 v1(18346,10212.47) ; v1@18338.22,10220.25 ccw(c18319.44,10239.03) 18346,10239.03 ccw(c18372.56,10239.03) v1@18353.78,10220.25
LED1: D3.2 U3.42 | length 1547.3
  Top Layer w10: U3.42@20123.13,10338.63 20242.22,10338.63 20251.6,10329.25 20391.24,10329.25 20409.25,10347.26 20409.25,11053.23 20549,11192.98 20549,11435.5 D3.2@20593.5,11480 ; 20568.44,11454.93 cw(c20593.5,11429.86) D3.2@20593.5,11465.32 ; D3.2@20577.94,11464.44 ccw(c20566.31,11476.06) D3.2@20582.76,11476.06
LED2: D4.2 U3.43 | length 1468.7
  Top Layer w10: U3.43@20123.13,10358.32 20247.81,10358.32 20259,10347.13 20383.83,10347.13 20391.37,10354.67 20391.37,10369 20391.37,11432.87 D4.2@20443.5,11485 ; 20418.44,11459.93 cw(c20443.5,11434.86) D4.2@20443.5,11470.32 ; D4.2@20427.94,11469.44 ccw(c20416.31,11481.06) D4.2@20432.76,11481.06
NetANT1_1: ANT1.1 C31.1 L5.2 | length 391.9
  Top Layer w25: L5.2@20005,11126 L5.2@20010,11131
  Top Layer w40: ANT1.1@19989.34,11329.34 cw(c19939.47,11279.47) 20010,11279.47 cw(c20080.53,11279.47) ANT1.1@20030.66,11329.34 ; L5.2@20005,11126 C31.1@20095,11126 ; L5.2@20010,11131 ANT1.1@20010,11315
NetC13_2: C13.2 U3.5 Y1.1 | length 496.6
  Top Layer w10: U3.5@19971.55,10529.58 19971.55,10699.31 Y1.1@20012.24,10740 C13.2@20169,10740 ; Y1.1@20022.63,10729.62 cw(c20047.7,10704.55) 20047.7,10740 cw(c20047.7,10775.45) Y1.1@20022.63,10750.38 ; C13.2@20155.89,10729.39 ccw(c20130.29,10703.79) 20130.29,10740 ccw(c20130.29,10776.21) C13.2@20155.89,10750.61
NetC20_2: C20.2 U3.6 Y1.2 | length 537.5
  Top Layer w10: C20.2@19756,10715 19781,10740 ; C20.2@19758.5,10730 ccw(c19758.5,10760.18) 19779.84,10738.84 ; C20.2@19773.35,10717.1 cw(c19800.11,10720.89) 19781,10740 ; Y1.2@19907.37,10729.62 ccw(c19882.3,10704.55) 19882.3,10740 ccw(c19882.3,10775.45) Y1.2@19907.37,10750.38 ; Y1.2@19917.8,10727.44 cw(c19918.09,10697.92) 19938.96,10718.8 ; Y1.2@19932.44,10732.13 ccw(c19948.88,10732.13) 19937.26,10720.5 ; U3.6@19951.87,10529.58 19951.87,10705.89 Y1.2@19917.76,10740 19781,10740
NetC21_2: C21.2 R13.1 U3.7 | length 766.4
  Top Layer w10: R13.1@19556,10715.35 19597.29,10715.35 19677.64,10635 C21.2@19694,10635 19736,10677 19911.44,10677 19932.18,10656.26 U3.7@19932.18,10529.58 ; R13.1@19569.11,10704.74 cw(c19594.71,10679.14) 19594.71,10715.35 cw(c19594.71,10751.56) R13.1@19569.11,10725.96 ; 19642.23,10670.41 ccw(c19691.5,10719.67) C21.2@19691.5,10650 ; 19659.31,10653.34 ccw(c19691.5,10685.53) C21.2@19691.5,10640 ; C21.2@19696.5,10650 ccw(c19696.5,10680.18) 19717.84,10658.84 ; C21.2@19711.5,10635 cw(c19753.75,10635) 19723.87,10664.87
NetC28_1: C28.1 C29.1 U6.4 | length 414.4
  Top Layer w10: C28.1@19545.39,11145.61 ccw(c19519.79,11171.21) 19556,11171.21 ccw(c19592.21,11171.21) C28.1@19566.61,11145.61 ; C29.1@19545.39,11204.39 cw(c19519.79,11178.79) 19556,11178.79 cw(c19592.21,11178.79) C29.1@19566.61,11204.39 ; C29.1@19556,11215 C28.1@19556,11135 19625.53,11065.47 U6.4@19690.94,11065.47 ; C28.1@19558.5,11120 cw(c19558.5,11089.82) 19579.84,11111.16 ; C28.1@19573.5,11135 ccw(c19615.75,11135) 19585.87,11105.13
NetC28_2: C28.2 L2.2 | length 102.7
  Top Layer w25: L2.2@19421,11140 19426,11135 C28.2@19494,11135 ; L2.2@19428.8,11145.3 ccw(c19453.68,11170.18) 19453.68,11135